# Altium PCB EE463_PCB.PcbDoc
Units mm, origin at the board's own origin, x right, y up, seen from the top; angles counter-clockwise.
Board outline 66.41 x 59.18 mm, 2 copper layers (Top Layer, Bottom Layer); 52 components, 31 nets, 146 pads, 52 vias.
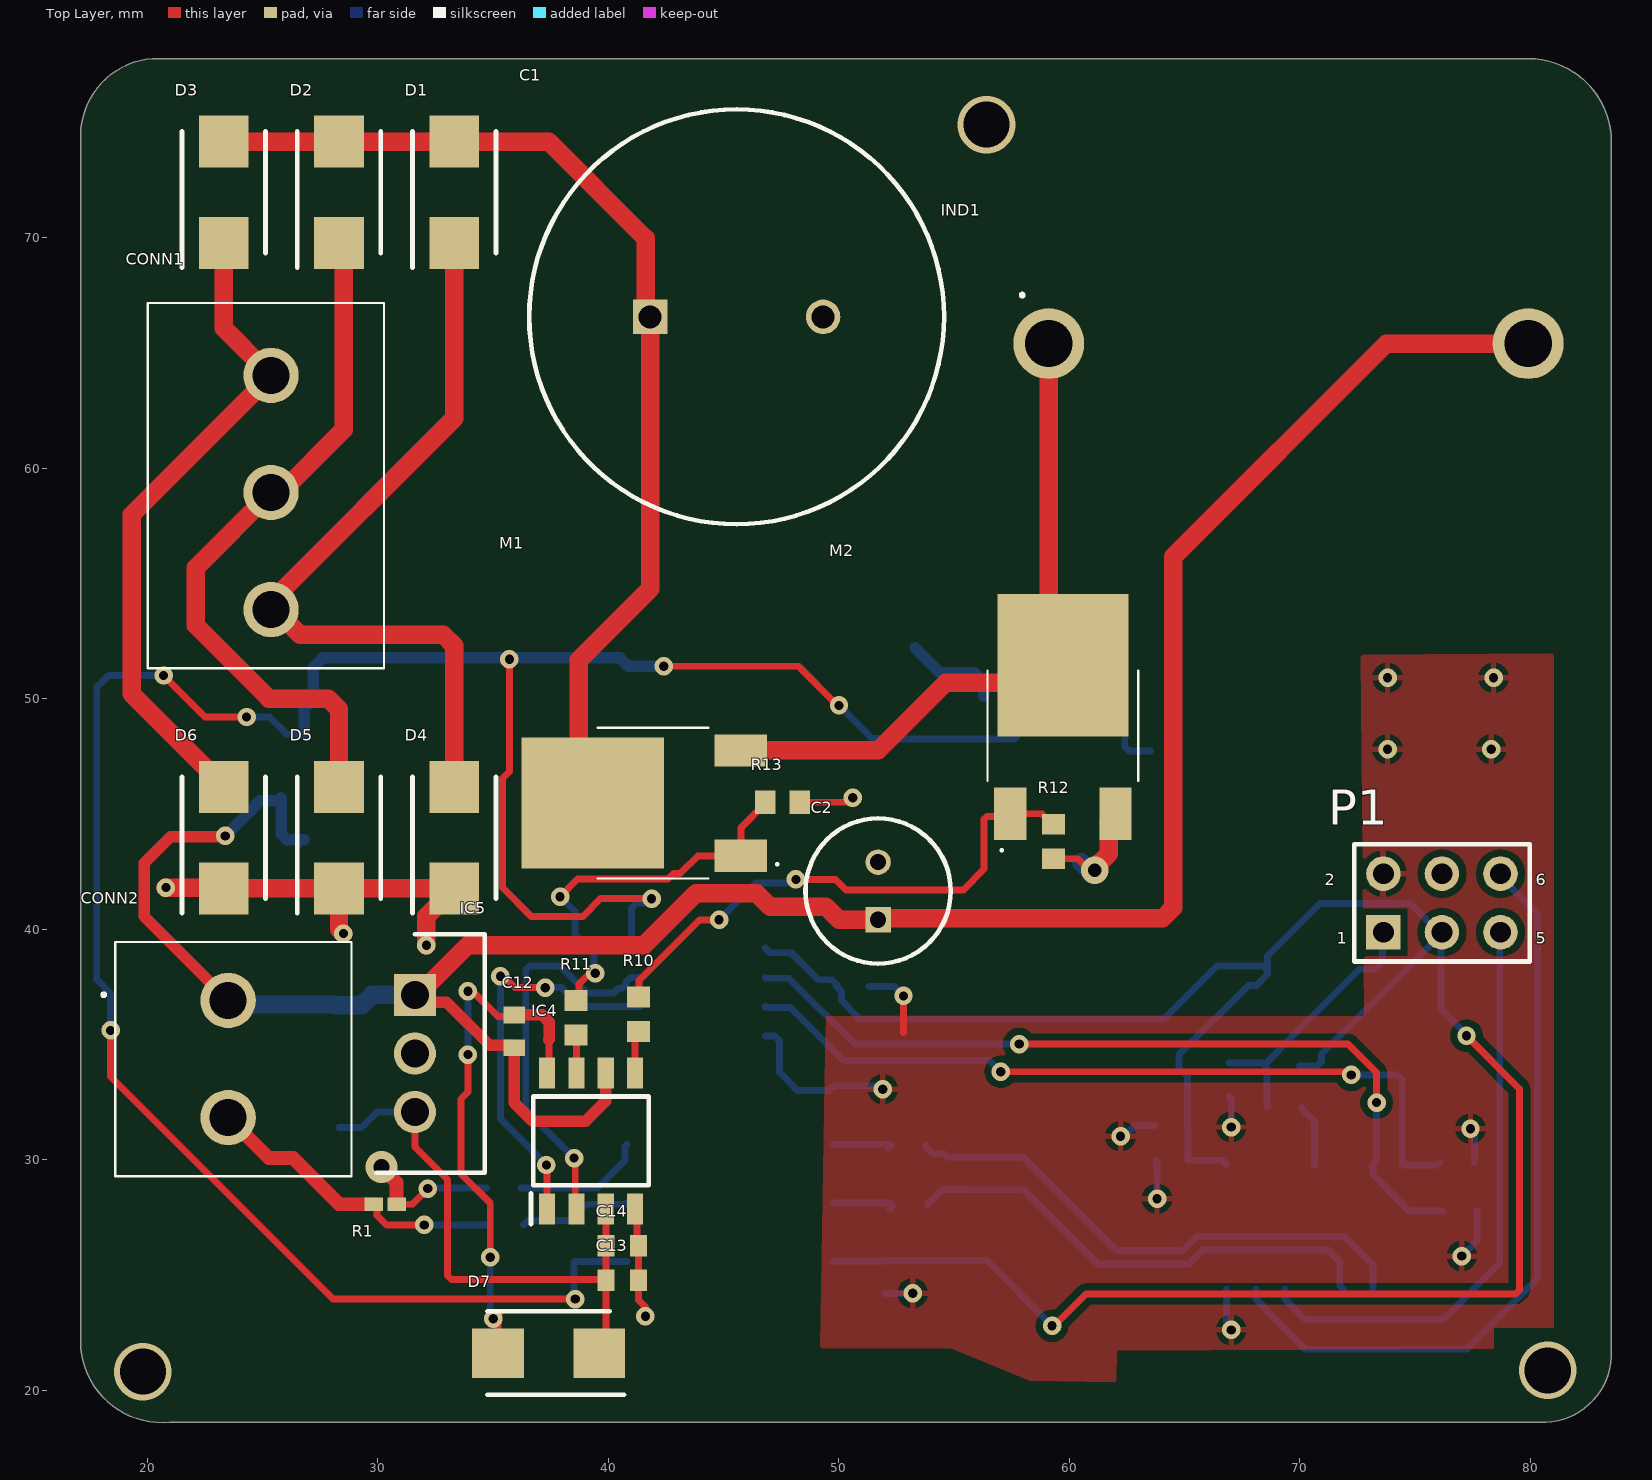
[diagram p0: Top Layer view]
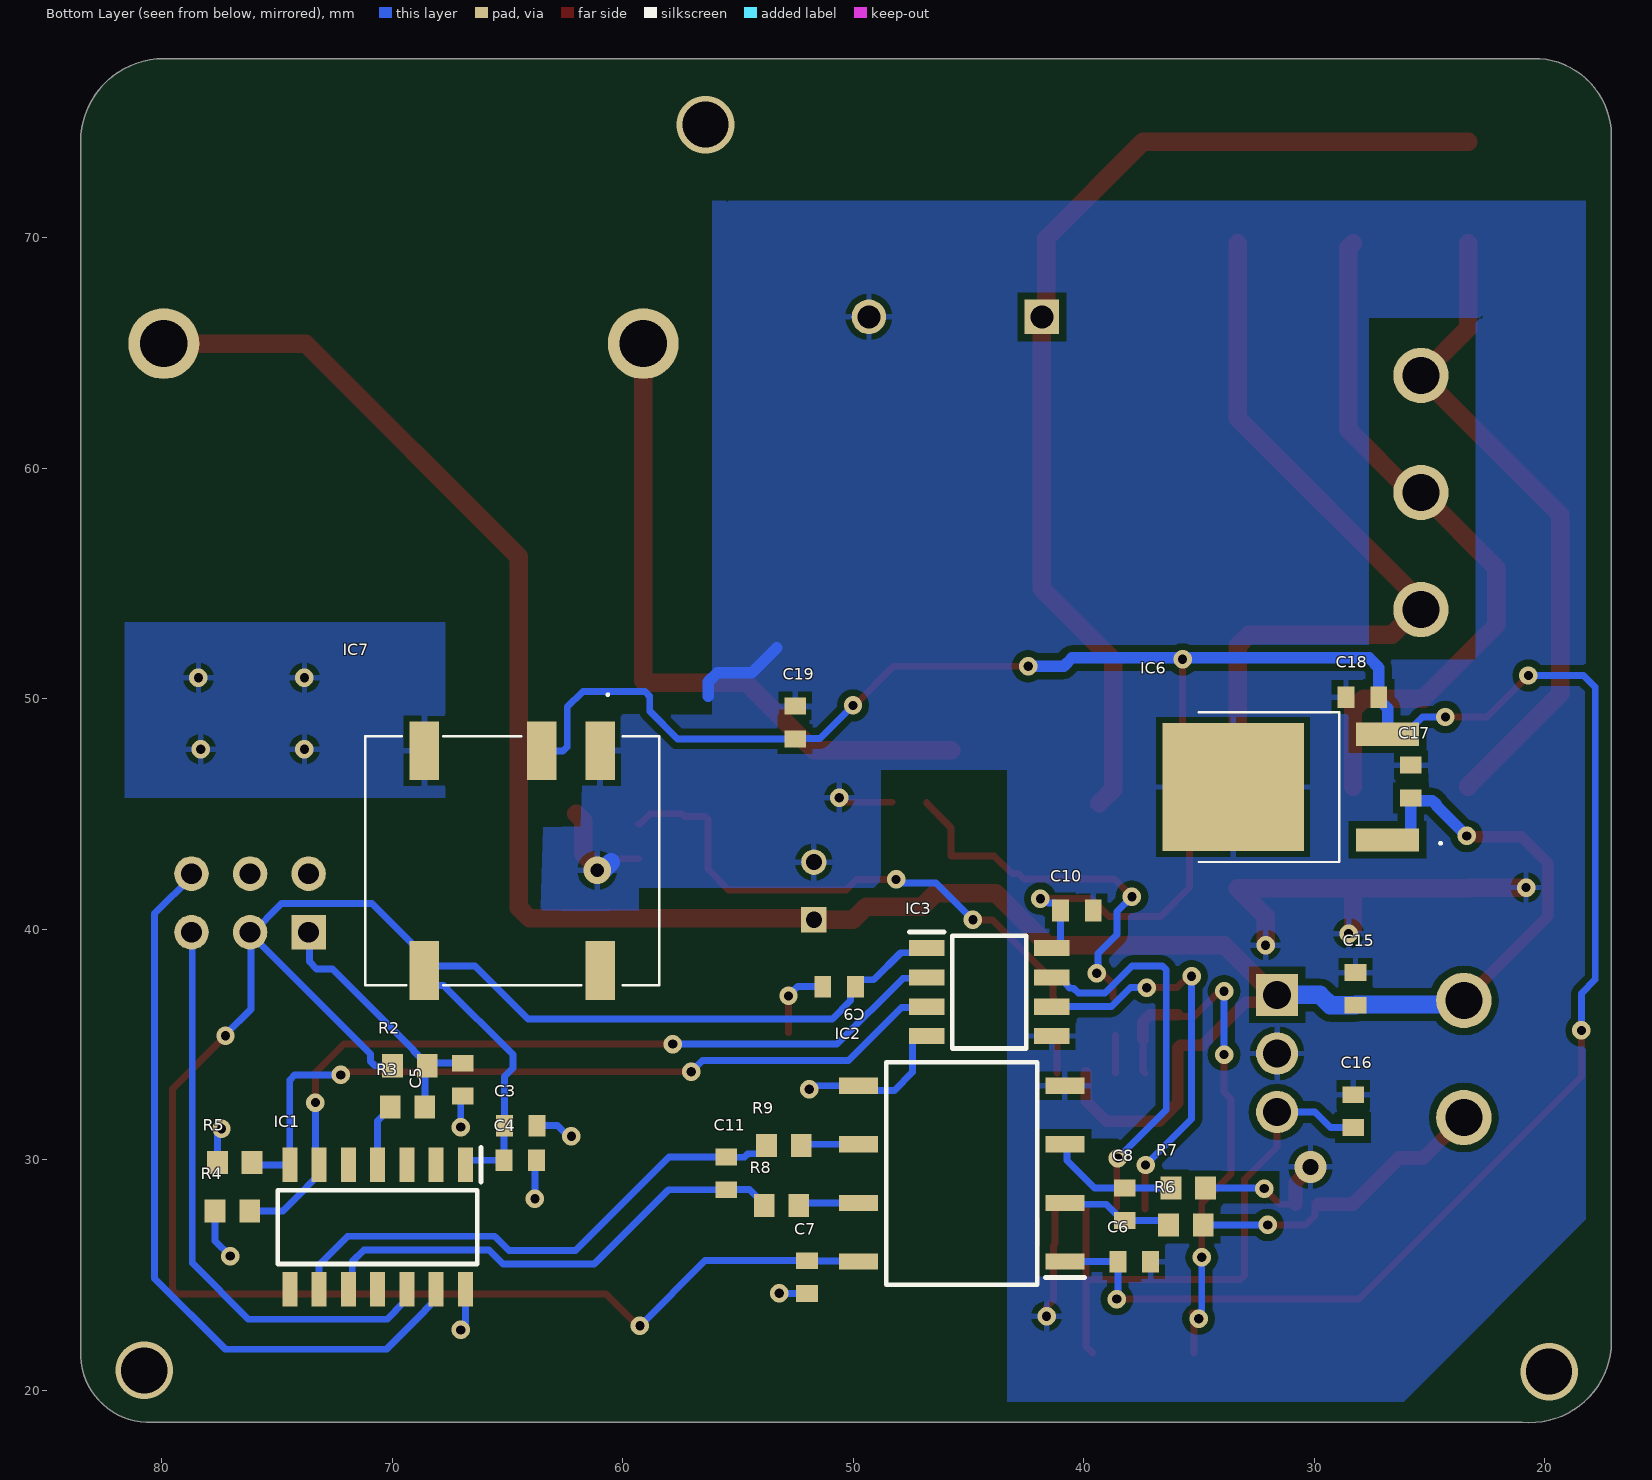
[diagram p1: Bottom Layer view, seen from below]
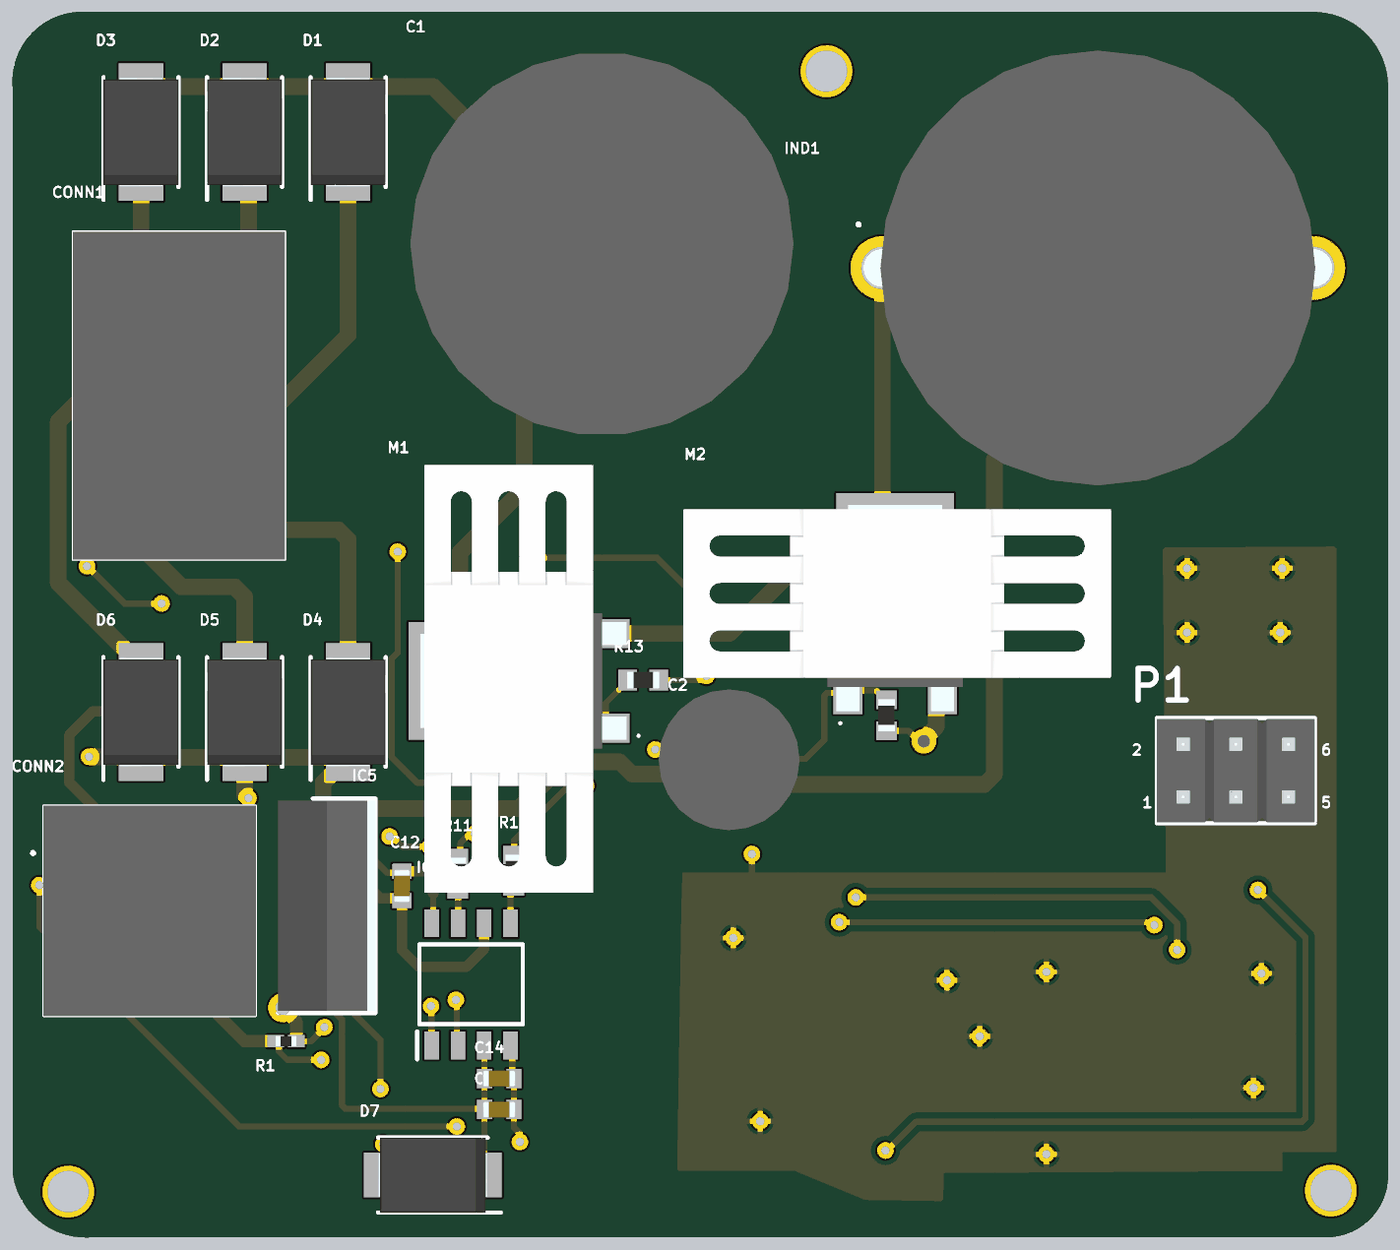
[diagram p2: 3D render of the assembled board from above, using the file's embedded part models]
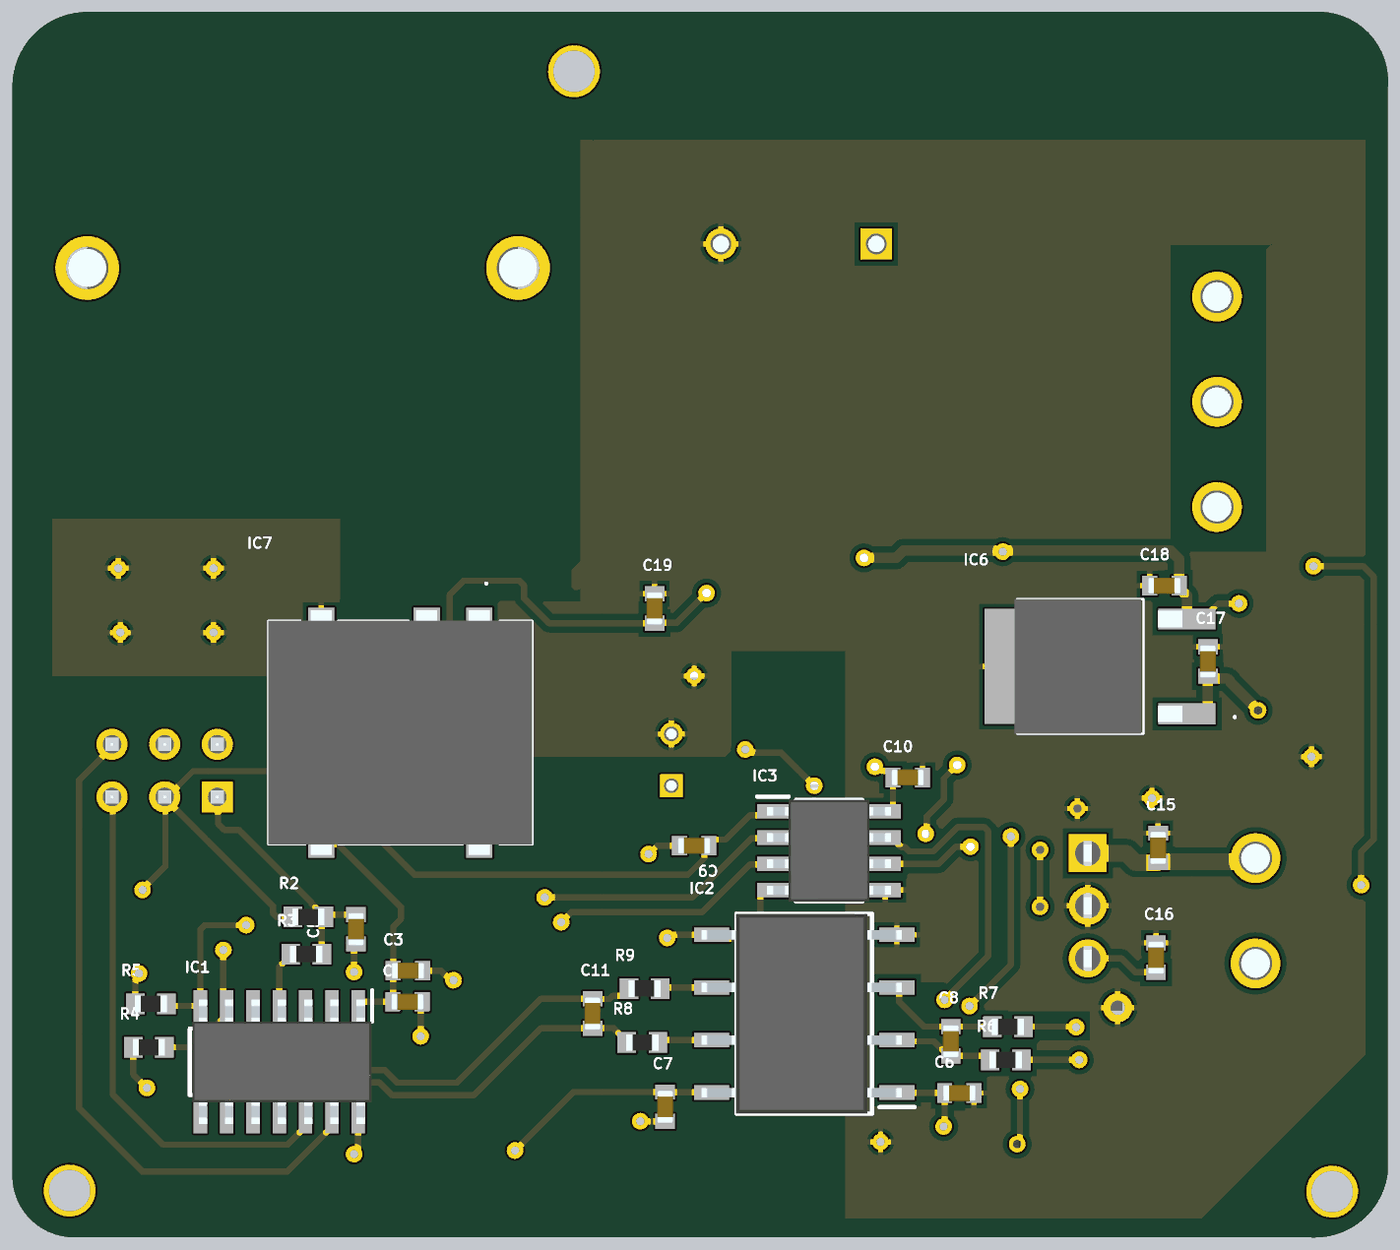
[diagram p3: 3D render of the assembled board from below, using the file's embedded part models]

## Layer stack, top to bottom
Top Solder: solder mask 0.0102, Solder Resist, Dk 3.5
Top Layer: signal copper 0.0356
Dielectric 1: dielectric 0.32, FR-4, Dk 4.8
Bottom Layer: signal copper 0.0356
Bottom Solder: solder mask 0.0102, Solder Resist, Dk 3.5

## Board outline
17.109,21.8 17.109,74.161 cw(c20.461,74.409) 20.213,77.761 79.909,77.761 cw(c79.909,74.161) 83.509,74.161 83.509,21.7 cw(c80.538,21.571) 80.667,18.6 20.97,18.6 cw(c20.64,22.13)

## Design rules (kind name [scope] priority, off if disabled: settings)
Clearance [All] p1: gap=0.3 ignorepadtopadclearanceinfootprint=FALSE except(0: Arc-Hole Track-Hole SMDPad-Hole THPad-Hole Via-Hole Fill-Hole Poly-Hole Region-Hole Text-Hole; 0.1: SMDPad-SMDPad)
Height [All] p1: minheight=0 maxheight=50 prefheight=12.7
MinimumSolderMaskSliver [All] p1: minsoldermaskwidth=0.1
PolygonConnect [All] p1: connectstyle=Relief reliefconductorwidth=0.254 reliefentries=4 polygonreliefangle="90 Angle" airgapwidth=0.254
RoutingVias [All] p1: holewidth=0.4 width=0.8 viastyle="Through Hole" minholewidth=0.1 minwidth=0.2 maxholewidth=2.5 maxwidth=3
SilkToSilkClearance [All] p1: silktosilkclearance=0.1
SilkToSolderMaskClearance [IsPad] p1: minsilkscreentomaskgap=0 clearancetoexposedcopper=TRUE
SolderMaskExpansion [All] p1: expansion=0.102 istentingtop=FALSE
Width [All] p1: maxlimit=1 minlimit=0.2 preferedwidth=0.3
26 further rules are at their usual default settings.

## Classes and differential pairs
component class S6: C3 C4 C5 IC1 R2 R3 R4 R5
component class S5: CONN1 CONN2 CONN3 P1
component class S4: C6 C7 C8 C9 C10 C11 IC2 IC3 R6 R7 R8 R9
component class S3: C15 C16 C17 C18 C19 IC5 IC6 IC7
component class S2: C2 C12 C13 C14 D7 IC4 IND1 M1 M2 R1 R10 R11 R12 R13
component class S1: C1 D1 D2 D3 D4 D5 D6

## Components (designator, comment, footprint, x,y, rotation, side; value= is the part's Value field where it differs from the comment)
C1 "CAP 100uf EKXL401ELL101MM25S" EKXL401ELL101MM25S 41.809,66.561 r0 top
C2 "CAP 100uF 860020573008" 860020573008 51.7,40.4 r90 top
C3 "CAP 10nF" 0603_CAP 64.417,31.469 r0 bottom
C4 "CAP 100nF" 0603_CAP 64.437,29.969 r180 bottom
C5 "CAP 100nF" 0603_CAP 66.927,33.469 r90 bottom
C6 "CAP 100nF" 0603_CAP 37.799,25.561 r0 bottom
C7 "CAP 100nF" 0603_CAP 52,24.9 r270 bottom
C8 "CAP 10nF" 0603_CAP 38.209,28.061 r270 bottom
C9 "CAP 100nF" 0603_CAP 50.6,37.5 r0 bottom
C10 "CAP 100nF" 0603_CAP 40.29,40.8 r0 bottom
C11 "CAP 1uF" 0603_CAP 55.5,29.4 r270 bottom
C12 "CAP 1uF" 0603_CAP 35.909,35.561 r90 top
C13 "CAP 1uF" 0603_CAP 40.599,24.761 r180 top
C14 "CAP 1uF" 0603_CAP 40.599,26.261 r180 top
C15 "CAP 330nF" 0603_CAP 28.2,37.4 r270 bottom
C16 "CAP 100nF" 0603_CAP 28.3,32.1 r90 bottom
C17 "CAP 330nF" 0603_CAP 25.8,46.4 r270 bottom
C18 "CAP 100nF" 0603_CAP 27.899,50.061 r180 bottom
C19 "CAP  22uF" 0603_CAP 52.509,48.961 r90 bottom
CONN1 "CONN KLE3" kle3 25.361,53.859 r90 top
CONN2 "CONN KLE2" kle2 23.5,36.9 r270 top
D1 "DI S2GTR" S2GTR 33.309,71.961 r90 top
D2 "DI S2GTR" S2GTR 28.309,71.961 r90 top
D3 "DI S2GTR" S2GTR 23.309,71.961 r90 top
D4 "DI S2GTR" S2GTR 33.309,43.961 r90 top
D5 "DI S2GTR" S2GTR 28.309,43.961 r90 top
D6 "DI S2GTR" S2GTR 23.309,43.961 r90 top
D7 "DI S2GTR" S2GTR 37.4,21.6 r180 top
IC1 "PIC16F1614" PIC16F1613 66.055,30.752 r270 bottom
IC2 "SI8920BC" SI8920BC-IP 39.696,24.184 r0 bottom
IC3 "SI8620AB" SI8620AB 47.898,40.186 r180 bottom
IC4 "BS2103F" BS2103F 37.339,27.89 r90 top
IC5 "UA7812CKCS" UA7812CKCS 34.902,40.061 r270 top
IC6 "UA78M33CKVURG3" UA78M33CKVURG3 23.507,41.97 r0 bottom
IC7 "R1SX-3333" R1SX_3333 57.419,35.853 r0 bottom
IND1 "IND, 1mH, B82615B2202M001" AIRD 59.1,65.4 r0 top
M1 "M?" FDD5N50NZ 42.526,45.461 r90 top
M2 "M?" FDD5N50NZ 59.714,48.218 r0 top
P1 "H3X2" H3X2 73.62,42.4 r0 top
R1 "RES, 0.01, 0402, Shunt" RES_0402 30.309,28.061 r0 top
R2 "RES, 10K, 0603" 0603_RES 69.227,34.069 r180 bottom
R3 "RES, 4K7, 0603" 0603_RES 69.327,32.269 r0 bottom
R4 "RES, 1K, 0603" 0603_RES 76.927,27.769 r180 bottom
R5 "RES, 1K, 0603" 0603_RES 76.827,29.869 r180 bottom
R6 "RES, 20, 0603" 0603_RES 35.559,27.161 r0 bottom
R7 "RES, 20, 0603" 0603_RES 35.459,28.761 r0 bottom
R8 "RES, 5K6, 0603" 0603_RES 53.1,28 r0 bottom
R9 "RES, 5K6, 0603" 0603_RES 53,30.6 r0 bottom
R10 "RES, 20, 0603" 0603_RES 41.3,36.3 r270 top
R11 "RES, 20, 0603" 0603_RES 38.6,36.15 r270 top
R12 "RES, 10K, 0603" 0603_RES 59.3,43.8 r90 top
R13 "RES, 10K, 0603" 0603_RES 47.55,45.5 r180 top

## Footprints (in the part's own frame and the unit in brackets; to place one, negate y for a bottom-side part, rotate by r counter-clockwise, add the part's x,y. Pads: shape width x height; smd on the part's side, far side on the other; paste and mask are expansions set on the pad)
0603_CAP [mm]
  rect 0.73x0.94 smd: 1(-0.71,0) 2(0.71,0)
  body extent -0.8,-0.4 0.8,0.4, height 0.9
0603_RES [mm]
  rect 0.9x1 smd: 1(-0.75,0) 2(0.75,0)
  body extent -0.77,-0.4 0.78,0.4, height 0.55
860020573008 [mm]
  rect 1.1x1.1 / inner round 1.1 / far side rect 1.1x1.1 hole 0.7: 1(0,0)
  round 1.1 hole 0.7: 2(2.5,0)
  silkscreen extent -1.9,-3.15 4.4,3.15, body extent -2.15,-3.4 4.65,3.4, height 12.5
AIRD [mm]
  round 3.075 hole 2.05: 1(0,0) 2(20.8,0)
  silkscreen extent -1.2,2.05 -1.1,2.15, body extent -0.93,-10.5 21.72,10.5, height 21.1
BS2103F [mm]
  rect 1.35x0.7 smd: 1(-0.029,0) 2(-0.029,-1.27) 3(-0.029,-2.54) 4(-0.029,-3.81) 5(5.871,-3.81) 6(5.871,-2.54) 7(5.871,-1.27) 8(5.871,0)
  silkscreen extent -0.7,-4.41 4.85,0.7, body extent 0.76,-4.44 5.08,0.64, height 1.85
EKXL401ELL101MM25S [mm]
  rect 1.5x1.5 / inner round 1.5 / far side rect 1.5x1.5 hole 1: 1(0,0)
  round 1.5 hole 1: 2(7.5,0)
  silkscreen extent -5.25,-9 12.75,9, body extent -5.5,-9.25 13,9.25, height 38
FDD5N50NZ [mil]
  rect 55x90 smd: 1(-90,-126.69) 3(90,-126.69)
  rect 224.02x243.31 smd: 2(0,126.65)
  silkscreen extent -129,-191 129,118, body extent -403,-166 411,226, height 385
H3X2 [mm]
  rect 1.5x1.5 hole 0.9: 1(0,-2.54)
  round 1.5 hole 0.9: 2(0,0) 3(2.54,-2.54) 4(2.54,0) 5(5.08,-2.54) 6(5.08,0)
  silkscreen extent -1.27,-3.81 6.35,1.27, body extent -1.27,-3.77 6.35,1.23, height 9.01
kle2 [mm]
  round 2.4 hole 1.6: 1(0,0) 2(5.08,0)
  silkscreen extent -2.54,-5.45 7.62,5.35, body extent -2.54,-4.9 7.62,5.35, height 14.1
kle3 [mm]
  round 2.4 hole 1.6: 1(0,0) 2(5.08,0) 3(10.16,0)
  silkscreen extent -2.54,-4.9 13.3,5.35, body extent -2.54,-4.9 13.3,5.35, height 14.5
PIC16F1613 [mm]
  rect 1.5x0.65 smd: 1(0.983,-0.762) 2(0.983,-2.032) 3(0.983,-3.302) 4(0.983,-4.572) 5(0.983,-5.842) 6(0.983,-7.112) 7(0.983,-8.382) 8(6.383,-8.382) 9(6.383,-7.112) 10(6.383,-5.842) 11(6.383,-4.572) 12(6.383,-3.302) 13(6.383,-2.032) 14(6.383,-0.762)
  silkscreen extent 0.23,-8.9 5.28,-0.09, body extent 0.68,-8.77 6.68,-0.12, height 1.75
R1SX_3333 [mm]
  rect 1.27x2.54 smd: 1(3.551,-11.877) 2(6.091,-11.877) 4(11.181,-11.877) 5(11.181,-2.347) 8(3.551,-2.347)
  silkscreen extent 0.99,-14.36 13.74,-1.71, body extent 0.99,-13.02 13.74,-1.2, height 6.25
RES_0402 [mm]
  rect 0.8x0.6 smd: 1(-0.5,0) 2(0.5,0)
  body extent -0.5,-0.25 0.5,0.25, height 0.4
S2GTR [mm]
  rect 2.25x2.15 smd: 1(-2.2,0) 2(2.2,0)
  silkscreen extent -3.27,-1.81 2.65,1.81, body extent -2.65,-1.81 2.65,1.81, height 2.5
SI8620AB [mm]
  rect 1.525x0.7 smd: 1(1.098,-1.016) 2(1.098,-2.286) 3(1.098,-3.556) 4(1.098,-4.826) 5(6.522,-4.826) 6(6.522,-3.556) 7(6.522,-2.286) 8(6.522,-1.016)
  silkscreen extent 0.34,-5.37 5.41,-0.32, body extent 0.81,-5.37 6.81,-0.47, height 1.75
SI8920BC-IP [mm]
  rect 1.7x0.7 smd: 1(1.113,-1.397) 2(1.113,-3.937) 3(1.113,-6.477) 4(1.113,-9.017) 5(10.063,-9.017) 6(10.063,-6.477) 7(10.063,-3.937) 8(10.063,-1.397)
  silkscreen extent 0.26,-10.03 8.86,-0.38, body extent 0.89,-10.03 10.54,-0.38, height 4.19
UA78M33CKVURG3 [mm]
  rect 2.75x1 smd: 1(3.302,-1.901) 3(3.302,-6.481)
  rect 6.15x5.55 smd: 2(10.002,-4.191)
  silkscreen extent 0.95,-7.44 11.5,-0.94, body extent 3.53,-7.44 11.63,-0.94, height 2.62
UA7812CKCS [mm]
  rect 1.83x1.83 / inner round 1.83 / far side rect 1.83x1.83 hole 1.22: 1(2.921,-3.302)
  round 1.83 hole 1.22: 2(5.461,-3.302) 3(8.001,-3.302)
  silkscreen extent 0.28,-4.98 10.64,-0.28, body extent 0.38,-4.98 10.54,-0.28, height 19.35

## Part data
D1 D2 D3 D4 D5 D6 D7: "DI, S2GTR, 400V, 2A"
IC1: library part "IC PIC16, PIC16F1614"
IC2: library part "IC ISO OP-AMP,SI8920BC"
IC3: library part "IC ISO DIG, SI8620AB"
IC4: library part "IC DRV, HALF-B, BS2103F"
IC5: library part "IC, LVR, UA7812CKCS"
IC6: library part "IC, LVR, UA78M33CKVURG3, 24/3V3"
IC7: library part "IC, DC/DC, ISO, R1SX-3333"
IND1: "IND, 5mH, B82615B2202M001, 250V, 2A"
M1 M2: library part "MOS, N-CH, FDD5N550NZ", "MOS, N-CH, FDD5N550NZ, 2A"
R1: "RES, 0.01, 0402, Shunt, CSS0402FT10L0", Parameter 1=0.01
C1 C2: Parameter 1=100uF
C3 C8: Parameter 1=10nF
C4 C5 C6 C7 C9 C10 C16 C18: Parameter 1=100nF
C11 C12 C13 C14: Parameter 1=1uF
C15 C17: Parameter 1=330nF
C19: Parameter 1=22uF
R2 R12 R13: Parameter 1=10K
R3: Parameter 1=4K7
R4 R5: Parameter 1=1K
R6 R7 R10 R11: Parameter 1=20
R8 R9: Parameter 1=5K6

## Via types
v1: diameter 0.8, hole 0.4, Top Layer to Bottom Layer, 47 vias
v2: diameter 2.5, hole 2, Top Layer to Bottom Layer, 3 vias
v3: diameter 1.2, hole 0.6, Top Layer to Bottom Layer, 1 vias
v4: diameter 1.4, hole 0.7, Top Layer to Bottom Layer, 1 vias

## Nets (pads, with @x,y where several pads share a name; then routed paths per layer and width w, separated by ;. In a path a pad name is that pad's centre, name@x,y a point inside that pad or via, vN(x,y) a via of type N, cw(c..) or ccw(c..) an arc to the next point about the centre after c; other vN are vias at no path point)
3V3: C6.2 C10.2 C18.2 C19.1 IC2.1 IC3.8 IC6.3 IC7.2 | length 120.2
  Top Layer w0.3: v1(18.4,35.6) 18.4,33.6 28.055,23.945 v1(38.555,23.945) ; v1(20.7,51) 22.5,49.2 v1(24.3,49.2) ; v1(35.7,51.7) 35.7,46.832 35.4,46.532 35.4,41.8 36.65,40.55 38.887,40.55 39.653,41.316 v1(41.872,41.316) ; v1(42.4,51.4) 48.239,51.4 49.939,49.7 v1(50,49.7)
  Bottom Layer w0.3: v1(18.4,35.6) 18.4,37.2 17.8,37.8 17.8,50.5 18.3,51 v1(20.7,51) ; v1(24.3,49.2) 25.301,49.2 26.05,48.451 IC6.3 ; C18.2@27.189,49.956 C18.2 ; v1(38.555,23.945) 38.509,23.991 C6.2 38.529,25.581 IC2.1 ; IC3.8 41.2,39.17 41,39.37 C10.2 41,40.905 41.215,41.12 41.541,41.12 41.737,41.316 v1(41.872,41.316) ; v1(50,49.7) 51.439,48.261 52.499,48.261 C19.1 57.614,48.251 58.819,49.456 58.819,50.091 59.028,50.3 61.724,50.3 62.4,49.624 62.4,47.906 62.576,47.73 IC7.2
  Bottom Layer w0.5: IC6.3 26.809,49.576 C18.2@27.189,49.956 ; C18.2 27.189,51.341 27.609,51.761 40.5,51.761 40.861,51.4 v1(42.4,51.4)
12V: C13.2 C14.2 C16.1 D7.1 IC4.3 IC5.3 | length 24.6
  Top Layer w0.3: IC5.3 31.6,30.534 33.009,29.125 33.009,24.976 33.185,24.8 39.85,24.8 C13.2 ; D7.1 39.889,21.889 C13.2 ; IC4.3 39.884,27.856 39.884,26.266 C14.2 C13.2
  Bottom Layer w0.3: C16.1 29.29,31.39 29.96,32.06 IC5.3
ADC_H: C11.2 IC1.10 R8.2 | length 21.3
  Bottom Layer w0.3: R8.2 53.85,28.05 54.5,28.7 55.49,28.7 C11.2 57.996,28.69 61.227,25.459 65.182,25.459 65.792,26.069 71.227,26.069 71.727,25.569 71.727,24.539 IC1.10
ADC_L: C11.1 IC1.9 R9.2 | length 23.2
  Bottom Layer w0.3: R9.2 53.75,30.55 54.05,30.25 54.55,30.25 54.7,30.1 55.49,30.1 C11.1 57.99,30.11 62.041,26.059 64.933,26.059 65.543,26.669 71.927,26.669 73.167,25.429 IC1.9
Battery_Neg: CONN2.2 R1.1 R6.1 | length 13.4
  Top Layer w0.3: R1.1 29.959,27.911 29.959,27.574 30.373,27.161 v1(32.009,27.161)
  Top Layer w0.6: CONN2.2 25.259,30.061 26.309,30.061 28.309,28.061 R1.1
  Bottom Layer w0.3: v1(32.009,27.161) R6.1
Battery_Pos: C2.1 C12.1 C15.2 C17.2 CONN2.1 IC4.6 IC5.1 IC6.1 IND1.2 | length 109.7
  Top Layer w0.5: v1(23.377,44.039) 23.416,44 21,44 19.85,42.85 19.85,40.55 CONN2.1 ; IC5.1 31.914,36.828 32.972,36.828 34.834,34.966 35.794,34.966 C12.1 35.909,32.461 36.709,31.661 39.005,31.661 39.879,32.535 IC4.6
  Top Layer w0.8: IC5.1 32.115,37.655 32.255,37.655 33.9,39.3 41.55,39.3 43.8,41.55 46.428,41.55 47.013,40.966 49.434,40.966 50,40.4 C2.1 51.761,40.461 64.031,40.461 64.5,40.929 64.5,56.152 73.748,65.4 IND1.2
  Bottom Layer w0.3: CONN2.1 CONN2.1@23.749,36.9 ; IC6.1@26.599,43.661 IC6.1
  Bottom Layer w0.5: v1(23.377,44.039) 24.7,45.361 24.7,45.407 24.868,45.575 25.685,45.575 C17.2 25.8,44.121 26.05,43.871 IC6.1
  Bottom Layer w0.8: CONN2.1 23.675,36.725 28.165,36.725 C15.2 29.29,36.69 29.74,37.14 IC5.1
Buck_Pos: C1.1 D1.2 D2.2 D3.2 M1.2 | length 46.2
  Top Layer w0.8: D3.2 D2.2 D1.2 37.409,74.161 41.609,69.961 41.609,66.761 C1.1 41.809,54.761 38.709,51.661 38.709,46.061 M1.2
GATE_H: M1.1 R11.1 R13.2 | length 17
  Top Layer w0.3: v1(37.9,41.4) 38.666,42.166 42.586,42.166 42.82,42.4 43.1,42.4 43.875,43.175 M1.1 45.744,44.394 46.8,45.45 R13.2 ; R11.1 38.724,37.024 38.724,37.624 39.084,37.984 39.326,37.984 v1(39.422,38.08)
  Bottom Layer w0.3: v1(37.9,41.4) 38.541,40.759 38.541,39.759 39.37,38.93 39.37,38.132 v1(39.422,38.08)
GATE_L: M2.1 R10.1 R12.2 | length 23.5
  Top Layer w0.3: R10.1 41.324,37.074 41.324,37.774 43.95,40.4 v1(44.8,40.4) ; v1(48.133,42.15) 49.859,42.15 50.309,41.7 55.4,41.7 56.3,42.6 56.3,44.768 56.414,44.882 57.31,44.882 M2.1 58.8,45 59.25,44.55 R12.2
  Bottom Layer w0.3: v1(44.8,40.4) 46.4,42 47.983,42 v1(48.133,42.15)
ICSPCLK: IC1.12 P1.5 | length 25.4
  Bottom Layer w0.3: IC1.12 69.357,23.944 69.852,23.449 69.852,23.433 70.215,23.069 76.227,23.069 78.667,25.509 P1.5@78.667,39.769
ICSPDAT: IC1.13 P1.6 | length 33
  Bottom Layer w0.3: IC1.13 68.087,23.944 68.582,23.449 68.582,23.433 70.245,21.769 77.227,21.769 80.3,24.842 80.3,40.676 P1.6@78.667,42.309
ISO_3V3: C3.2 C4.1 C7.1 C9.1 IC1.1 IC2.8 IC3.1 IC7.5 P1.3 R2.1 | length 103.1
  Top Layer w0.3: v1@59.327,22.769 60.727,24.169 79.351,24.169 79.527,24.345 79.527,33.069 v1(77.227,35.369)
  Bottom Layer w0.3: IC3.1 47,38.97 47.93,38.97 49.1,37.8 49.675,37.8 49.89,37.585 C9.1 50.105,37.285 50.105,36.895 50.9,36.1 64.1,36.1 66.4,38.4 68.4,38.4 IC7.5 ; IC2.8 49.774,25.595 51.985,25.595 C7.1 56.422,25.61 v1(59.246,22.786) ; IC1.1 66.817,29.794 66.642,29.969 C4.1 65.137,29.979 65.137,31.459 C3.2 65.127,33.603 64.751,33.979 64.751,34.551 67.758,37.558 68.115,37.558 68.6,38.043 IC7.5 ; R2.1 70.751,34.069 70.927,34.245 70.927,34.569 P1.3@76.127,39.769 ; v1(77.227,35.369) 77.227,35.42 76.127,36.52 P1.3@76.127,39.769 ; IC7.5 68.6,38.835 70.865,41.1 74.796,41.1 P1.3@76.127,39.769
ISO_GND: C3.1 C4.2 C5.1 C7.2 C9.2 IC1.14 IC2.5 IC3.4 IC7.4 P1.2 R4.1 R5.1 | length 21.9
  Top Layer w0.3: 52.8,35.5 v1(52.8,37.1)
  Bottom Layer w0.3: IC3.4 47.212,35.36 47.413,35.16 47.413,33.787 48.2,33 48.5,33 ; 48.501,33.001 49.559,33.001 IC2.5 51.749,33.201 v1(51.9,33.05) ; C9.2 52.4,37.5 v1(52.8,37.1) ; C7.2 53.19,24.19 v1(53.2,24.2) ; v1(62.218,31.008) 62.353,31.008 62.814,31.469 C3.1 ; C4.2 63.8,29.896 v1(63.8,28.3) ; IC1.14 66.817,22.809 v1(67.018,22.608) ; C5.1 67.018,32.668 v1(67.018,31.408) ; v1(77.018,25.808) 77.677,26.467 R4.1 ; v1(77.398,31.337) 77.577,31.158 R5.1
  other v1: 73.8,47.8 78.3,47.8 73.8,50.9 78.4,50.9
ISO_PWM_H: IC1.6 IC3.2 R4.2 | length 36.4
  Top Layer w0.3: v1(57.818,35.008) 72.09,35.008 73.327,33.771 v1(73.327,32.469)
  Bottom Layer w0.3: IC3.2 46.837,37.863 47.837,37.863 50.692,35.008 v1(57.818,35.008) ; v1(73.327,32.469) 73.327,29.929 IC1.6 73.167,29.344 73.662,28.849 73.662,28.833 74.725,27.769 R4.2
ISO_PWM_L: IC1.7 IC3.3 R5.2 | length 34.3
  Top Layer w0.3: v1(57.017,33.808) 72.087,33.808 v1(72.227,33.669)
  Bottom Layer w0.3: IC3.3 46.83,36.6 47.9,36.6 50.2,34.3 56.526,34.3 v1(57.017,33.808) ; v1(72.227,33.669) 74.227,33.669 74.437,33.459 IC1.7 75.977,29.769 R5.2
MCLR: C5.2 P1.1 R2.2 R3.1 | length 11.7
  Bottom Layer w0.3: C5.2 68.367,34.179 R2.2 ; R3.1 68.577,33.969 R2.2 ; P1.1@73.587,39.769 73.587,38.587 73.269,38.269 72.59,38.269 69.077,34.755 69.077,34.719 68.477,34.119 R2.2
MOT_GND: C1.2 C2.2 C6.1 C10.1 C13.1 C14.1 C15.1 C16.2 C17.1 C18.1 C19.2 D4.1 D5.1 D6.1 IC2.4 IC3.5 IC4.4 IC5.2 IC6.2 IC7.1 M2.3 R1.2 R7.1 R12.1 R13.1 | length 40.7
  Top Layer w0.3: v4@30.15,29.657 v4(30.15,29.679) ; R1.2 31.505,28.061 32.184,28.739 v1(32.159,28.739) ; IC4.4 41.229,27.781 41.229,26.341 C14.1 C13.1 41.309,23.896 41.6,23.606 v1(41.6,23.2) ; R13.1 50.4,45.5 v1(50.6,45.7) ; R12.1 60.356,43.05 60.856,42.55 v3(61.1,42.55)
  Top Layer w0.6: v4@30.15,29.657 30.809,28.998 R1.2
  Top Layer w0.8: v1(20.8,41.8) 23.27,41.8 D6.1 D5.1 ; v1(28.5,39.8) 28.309,39.991 D5.1 ; v1(32.1,39.3) 32.1,40.552 D4.1 D5.1 ; v3(61.1,42.55) 61.1,42.658 61.702,43.26 61.702,44.702 M2.3
  Bottom Layer w0.3: v1@32.159,28.773 34.697,28.773 R7.1
  Bottom Layer w0.5: 53.3,52.2 54.389,51.111 55.894,51.111 56.279,50.726 56.279,50.091
  Bottom Layer w0.8: 60.5,42.9 60.85,42.55 v3(61.1,42.55)
NetC8_1: C8.1 IC2.3 R7.2 | length 5.7
  Bottom Layer w0.3: R7.2 36.219,28.771 C8.1 39.519,28.771 40.709,29.961 40.709,30.561 IC2.3
NetC8_2: C8.2 IC2.2 R6.2 | length 4.9
  Bottom Layer w0.3: R6.2 36.499,27.351 C8.2 38.314,27.351 39.024,28.061 40.749,28.061 IC2.2
NetC12_2: C12.2 D7.2 IC4.8 | length 23.6
  Top Layer w0.3: v1(33.9,37.3) 34.1,37.3 35.2,36.2 35.838,36.2 C12.2 ; v1(33.903,34.553) 33.903,32.921 33.607,32.625 33.607,29.376 34.87,28.113 v1(34.87,25.756) ; v1(35.005,23.095) 35.005,23.287 35.064,23.345 35.3,23.345 35.2,23.245 D7.2 ; IC4.8 37.413,33.835 37.413,35.196
  Top Layer w0.5: C12.2 37.12,36.271 37.429,35.961 37.429,35.213 37.413,35.196
  Bottom Layer w0.3: v1(33.9,37.3) 33.903,37.297 v1(33.903,34.553) ; v1(34.87,25.756) 34.87,23.231 v1(35.005,23.095)
NetM1_3: IND1.1 M1.3 M2.2 | length 29.2
  Top Layer w0.8: M1.3 51.695,47.747 54.626,50.678 59.009,50.678 59.1,50.769 IND1.1
NetR3_2: IC1.4 R3.2 | length 2.7
  Bottom Layer w0.3: R3.2 70.077,32.219 70.627,31.669 IC1.4
NetR8_1: IC2.7 R8.1 | length 2.8
  Bottom Layer w0.3: IC2.7 52.229,28.121 R8.1 R8.1@52.21,27.86
NetR9_1: IC2.6 R9.1 | length 2.7
  Bottom Layer w0.3: IC2.6 52.189,30.661 R9.1 R9.1@52.15,30.5
NetR10_2: IC4.5 R10.2 | length 1.9
  Top Layer w0.3: IC4.5 41.149,35.399 R10.2
NetR11_2: IC4.7 R11.2 | length 1.6
  Top Layer w0.3: R11.2 38.609,35.391 IC4.7
Phase_A: CONN1.1 D1.1 D4.2 | length 33.9
  Top Layer w0.8: D4.2 33.309,52.292 32.841,52.761 26.63,52.761 25.532,53.859 CONN1.1 25.361,54.213 33.309,62.161 D1.1
Phase_B: CONN1.2 D2.1 D5.2 | length 30.7
  Top Layer w0.8: D5.2 28.309,49.531 27.841,50 25.27,50 22.1,53.17 22.1,55.678 CONN1.2 25.787,58.939 28.509,61.661 28.509,69.561 D2.1
Phase_C: CONN1.3 D3.1 D6.2 | length 28.6
  Top Layer w0.8: D6.2 23.309,46.211 19.309,50.211 19.309,57.967 CONN1.3 25.145,64.235 23.309,66.071 D3.1
PWM_H: IC3.7 IC4.2 | length 17.1
  Top Layer w0.3: v1(38.509,30.061) 38.559,30.011 38.559,27.911 IC4.2
  Bottom Layer w0.3: v1(38.509,30.061) 36.409,32.161 36.409,38.224 36.585,38.4 37.9,38.4 39.07,37.23 40.227,37.23 40.427,37.43 40.588,37.43 40.763,37.606 40.763,37.7 40.963,37.9 IC3.7
PWM_L: IC3.6 IC4.1 | length 17.5
  Top Layer w0.3: v1(35.309,37.95) 35.444,37.95 35.94,37.455 v1(37.259,37.455) ; v1(37.309,29.761) 37.324,29.746 37.324,27.876 IC4.1
  Bottom Layer w0.3: v1(35.309,37.95) 35.309,31.761 v1(37.309,29.761) ; v1(37.259,37.455) 37.965,37.455 38.79,36.63 IC3.6
pads on no net: IC1.2 IC1.3 IC1.5 IC1.8 IC1.11 IC7.8 P1.4
copper on no net:
  other v2: 19.8,20.8 80.75,20.85 56.4,74.9

## Polygon pours and split planes (outlines as drawn)
MOT_GND on Bottom Layer "MOT_GND_L02_P002" (solid, remove dead copper, pour order 2): 55.5,71.5 55.4,71.6 18.2,71.6 18.2,27.4 26.1,19.5 43.3,19.5 43.3,46.9 48.8,46.9 48.8,42.1 49.1,41.8 56.751,41.8 59.303,41.8 59.303,40.806 61.818,40.766 63.556,40.806 63.432,44.407 61.818,44.47 61.604,49.336 56.1,49.3 56.1,49.5 56.1,71.6 55.5,71.6
ISO_GND on Bottom Layer "ISO_GND_L02_P001" (solid, remove dead copper, pour order 1): 67.7,53.3 81.6,53.3 81.6,45.7 67.7,45.7
ISO_GND on Top Layer "ISO_GND_L01_P000" (solid, remove dead copper, pour order 0): 49.442,36.208 72.784,36.208 72.631,51.903 81.018,51.954 81.018,36.208 81.018,22.208 80.618,21.808 62.056,21.7 62.038,20.339 58.276,20.395 54.853,21.808 48.618,21.808 49.189,21.808 49.394,34.635

## Other copper
Top Layer:
  pour cut-out: 79.45,22.7 82.15,22.7 82.15,20.4 81.8,20.05 78.4,20.05 78.4,21.65 78.4,22.7
Bottom Layer:
  pour cut-out: 22.7,66.5 27.6,66.5 27.6,51.6 27.5,51.5 27.3,51.7 23,51.7 23,66.3 22.7,66.6
  pour cut-out: 53.279,48.71 51.879,48.71 51.879,49.31 53.279,49.31
  pour cut-out: 37.5,24.7 37.5,26.1 38.1,26.1 38.1,24.7
  pour cut-out: 39.95,40.1 39.95,41.5 40.55,41.5 40.55,40.1
  pour cut-out: 27.65,49.4 27.65,50.8 28.25,50.8 28.25,49.4
  pour cut-out: 25.05,46.75 26.45,46.75 26.45,46.15 25.05,46.15
  pour cut-out: 27.6,32.45 29,32.45 29,31.85 27.6,31.85
  pour cut-out: 37.1,25.411 41.9,25.411 41.9,28.093 38.356,28.048 38.356,27.728 37.1,27.72
  pour cut-out: 31.5,29.5 36.9,29.5 36.9,28.1 31.5,28.1
  pour cut-out: 38.509,28.6 41.913,28.6 41.913,31.265 39.766,31.237 39.766,30.917 38.509,30.909

## Silkscreen, mask and mechanical layers (free items; w line width, h text height)
Mechanical 1:
  lines w0.2: 17.009,21.8 ccw(c20.59,22.18) 20.97,18.6 80.667,18.6 ccw(c80.538,21.571) 83.509,21.7 83.509,74.161 ccw(c79.909,74.161) 79.909,77.761 20.213,77.761 ccw(c20.411,74.359) 17.009,74.161 17.009,21.8

## Text inside footprints (layer, text, board x,y; h text height)
P1: Top Overlay "6" at 80.224,41.892 h0.5; Top Overlay "5" at 80.224,39.352 h0.5; Top Overlay "2" at 71.08,41.892 h0.5; Top Overlay "1" at 71.588,39.352 h0.5